# Altium PCB PCB1.PcbDoc
Units mil, origin at the board's own origin, x right, y up, seen from the top; angles counter-clockwise.
Board outline 3230 x 2225 mil, 2 copper layers (Top Layer, Bottom Layer); 34 components, 32 nets, 154 pads, 14 vias.
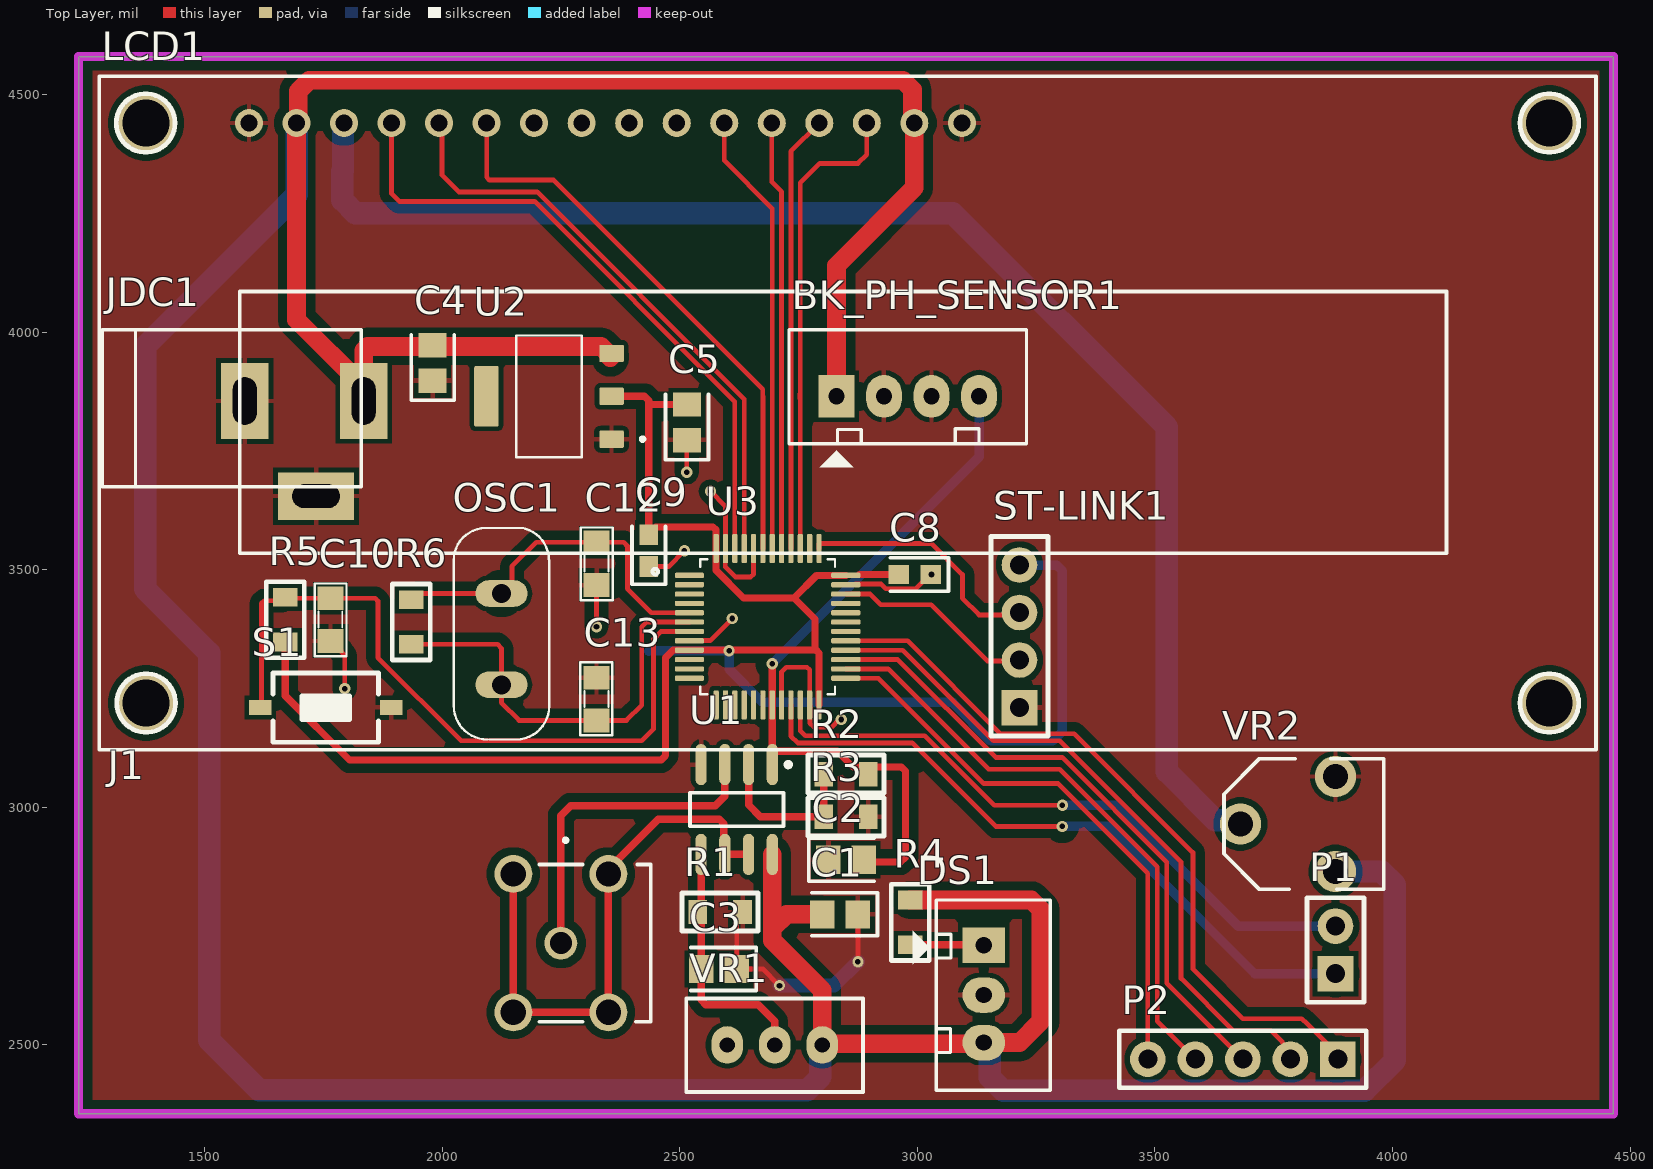
[diagram p0: Top Layer view]
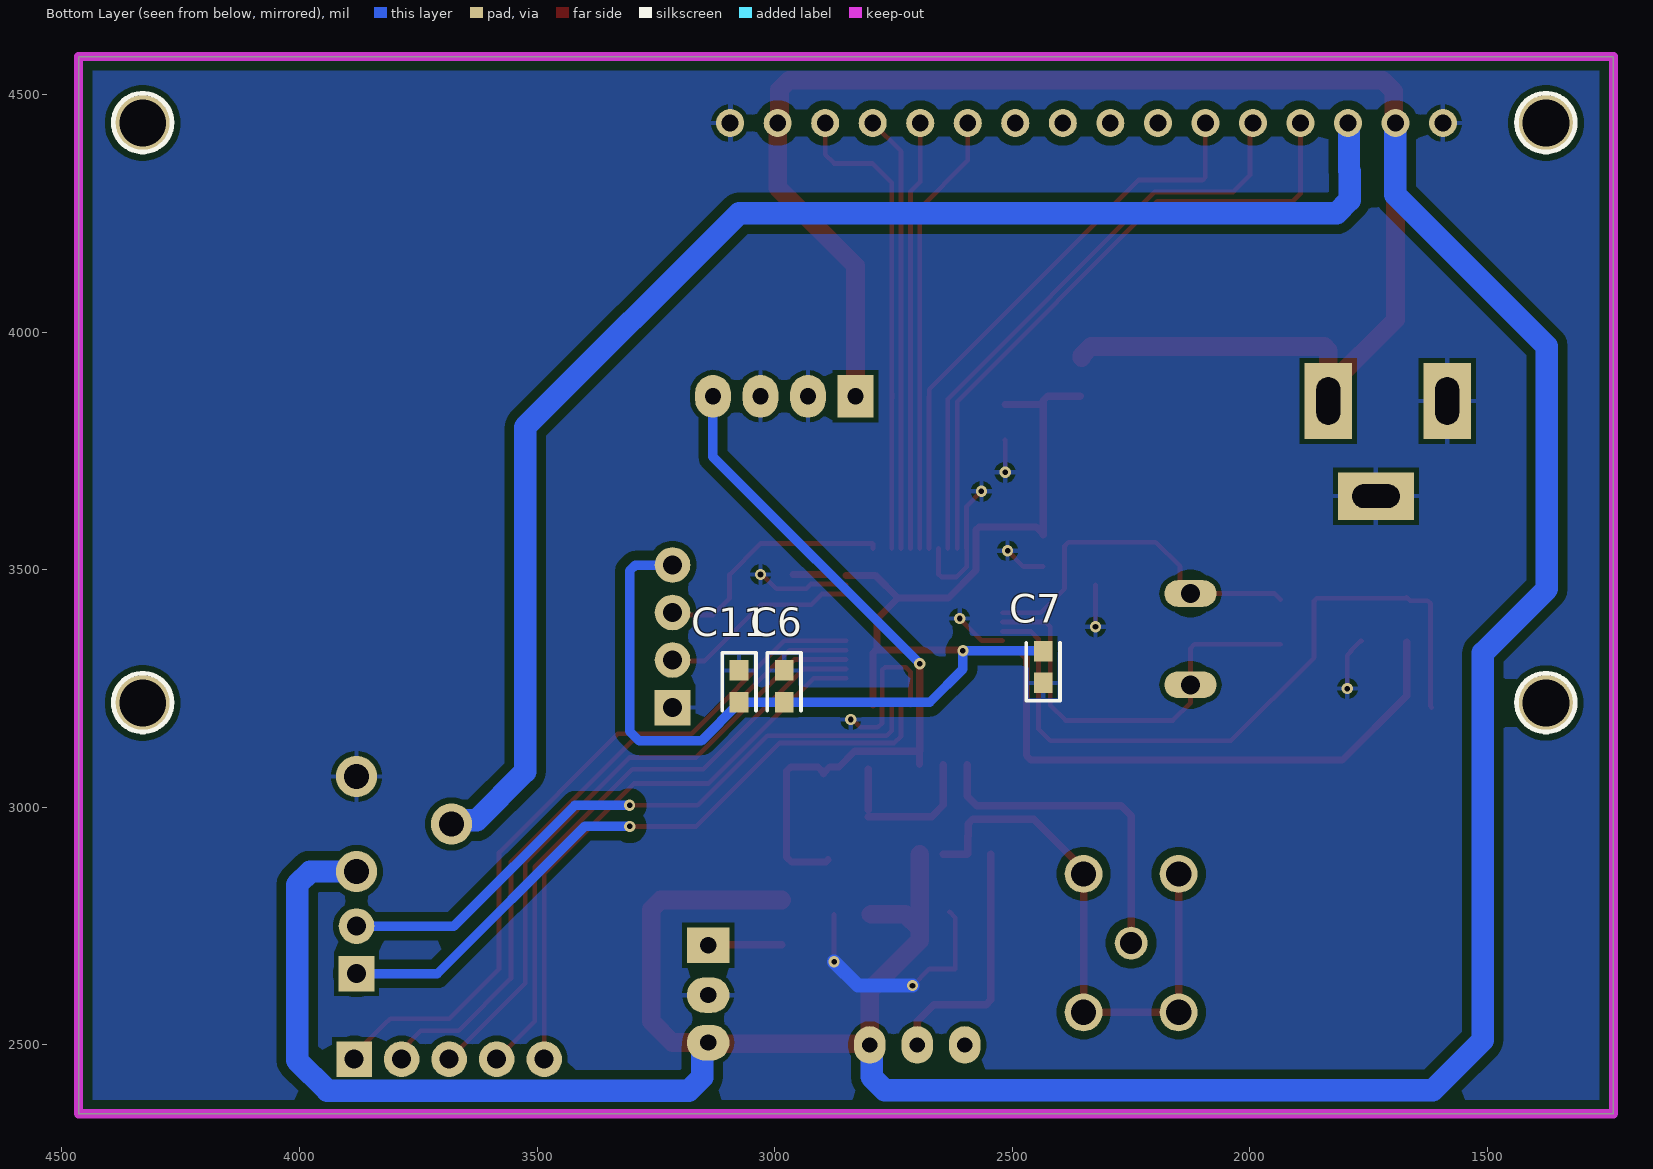
[diagram p1: Bottom Layer view, seen from below]
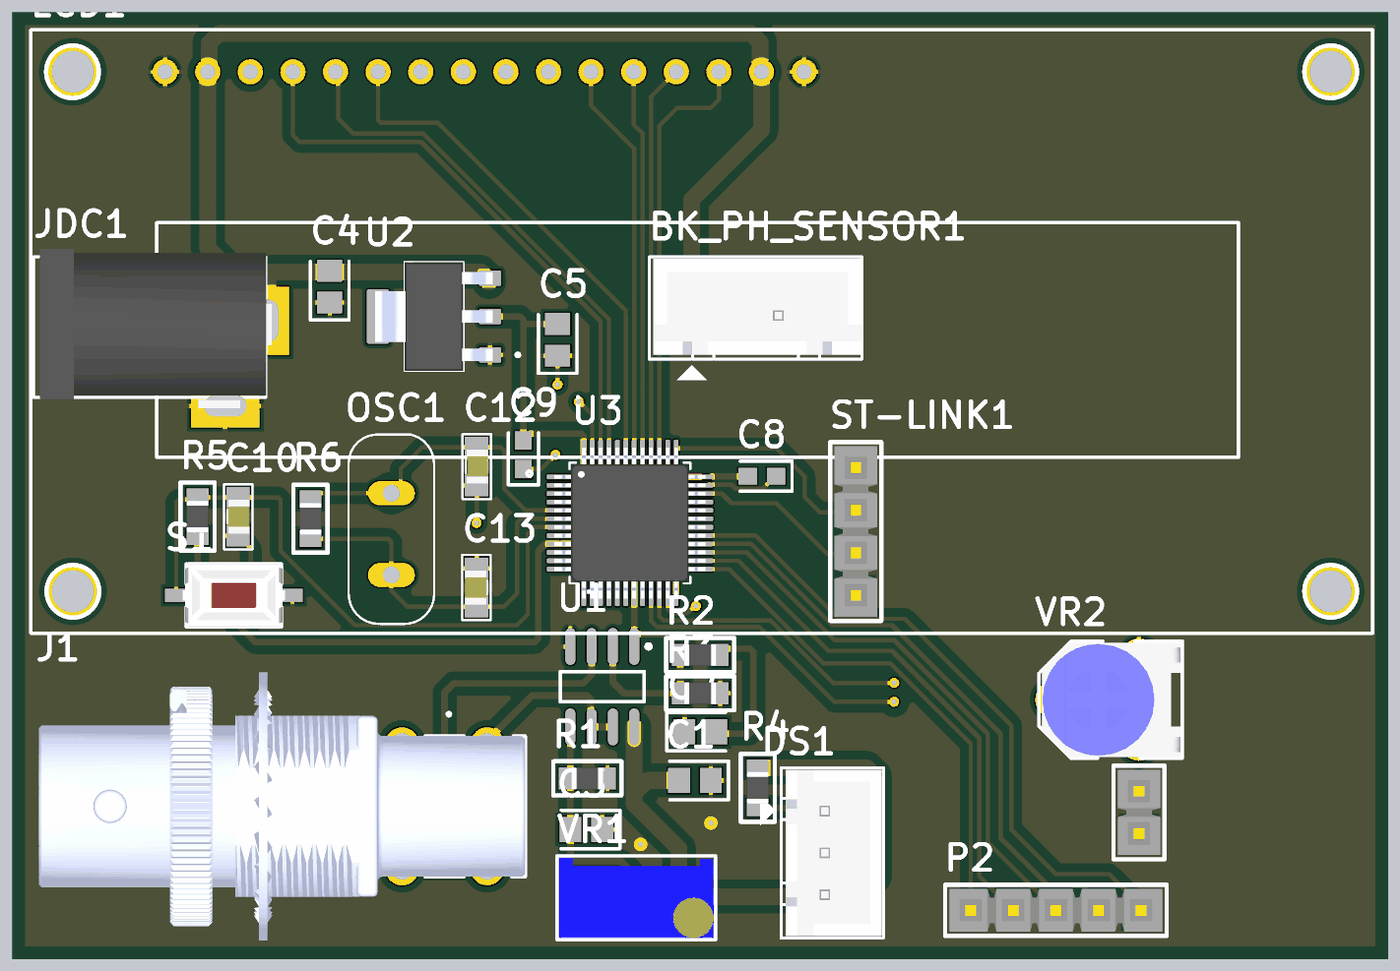
[diagram p2: 3D render of the assembled board from above, using the file's embedded part models]

## Layer stack, top to bottom
Top Solder: solder mask 0.4, Solder Resist, Dk 3.5
Top Layer: signal copper 1.4
Dielectric 1: dielectric 12.6, FR-4, Dk 4.8
Bottom Layer: signal copper 1.4
Bottom Solder: solder mask 0.4, Solder Resist, Dk 3.5

## Board outline
1235,2355 1235,4580 4465,4580 4465,2355

## Design rules (kind name [scope] priority, off if disabled: settings)
Clearance [All] p1: gap=10 ignorepadtopadclearanceinfootprint=TRUE except(5: Arc-Arc Arc-Track Arc-SMDPad Arc-THPad Arc-Via Track-Track Track-SMDPad Track-THPad Track-Via; 15: Arc-Hole Track-Hole; 20: Arc-Fill Arc-Poly Arc-Region Track-Fill Track-Poly Track-Region Via-Via Via-Fill Via-Poly Via-Region Fill-Fill Fill-Poly Fill-Region Poly-Poly Poly-Region Region-Region; 30: Fill-Hole Poly-Hole Region-Hole)
PolygonConnect [All] p1: connectstyle=Relief reliefconductorwidth=10 reliefentries=4 polygonreliefangle="90 Angle" airgapwidth=10
RoutingVias [All] p1: holewidth=11.81 width=23.62 viastyle="Through Hole" minholewidth=11.81 minwidth=23.62 maxholewidth=11.81 maxwidth=23.62
SolderMaskExpansion [All] p1: expansion=4 istentingtop=FALSE
Width [All] p1: maxlimit=47.24 minlimit=10 preferedwidth=30 toplayer_maxwidth=39.37 toplayer_prefwidth=10 bottomlayer_minwidth=20 minimp=50.000000 maximp=50.000000 favimp=50.000000
30 further rules are at their usual default settings.

## Classes and differential pairs
component class MCU: C6 C7 C8 C9 C10 C11 C12 C13 OSC1 P1 P2 R5 R6 S1 ST-LINK1 U3
component class Sheet3: BK_PH_SENSOR1 C1 C2 C3 C4 C5 DS1 J1 JDC1 LCD1 R1 R2 R3 R4 U1 U2 VR1 VR2

## Components (designator, comment, footprint, x,y, rotation, side; value= is the part's Value field where it differs from the comment)
BK_PH_SENSOR1 "JP4" CON4 2830,3865 r0 top value="Connector 4"
C1 "100nF" C2012-0805 2837.81,2774.72 r180 top
C2 "100nF" C2012-0805 2850,2890 r0 top
C3 "100nF" C2012-0805 2582.81,2659.72 r180 top
C4 "100nF" C2012-0805 1980,3935 r90 top
C5 "100nF" C2012-0805 2515,3810 r90 top
C6 "104" C1608-0603 2980.11,3255 r270 bottom
C7 "104" C1608-0603 2435,3295 r90 bottom
C8 "104" C1608-0603 2995,3490 r180 top
C9 "104" C1608-0603 2435,3540 r90 top
C10 "104" SM-0805 1765,3395 r90 top value=103
C11 "104" C1608-0603 3075.11,3255 r270 bottom
C12 "30pF" SM-0805 2325,3513 r90 top value=103
C13 "30pF" SM-0805 2325,3228 r270 top value=103
DS1 "JP3" CON3 3140,2705 r270 top value="Connector 3"
J1 "BNC5 - pH_Probe" SAMTEC_BNC5-J-P-GN-RA-BH2D 2250,2714.33 r270 top
JDC1 "Jac DC" DC-IN 1835,3855 r0 top
LCD1 "LCD16x2A" LCD16X2 1593.78,4440 r0 top
OSC1 "Crystal2" Crystal.HC49/USxx 2125,3450 r0 top value=8MHz
P1 "Header 2" "Header 2" 3880,2650 r90 top
P2 "Header 5" "Header 5" 3885,2470 r180 top
R1 "RESISTOR" R-0805 2585,2780 r180 top value=4.7K
R2 "RESISTOR" R-0805 2850,3070 r0 top value=10k
R3 "RESISTOR" R-0805 2850,2980 r180 top value=10k
R4 "RESISTOR" R-0805 2985,2758 r270 top value=4.7K
R5 "RESISTOR" R-0805 1670,3395 r270 top value=1K
R6 "RESISTOR" R-0805 1935,3390 r90 top value=1K
S1 "SW-SMD" SW-SMD 1755,3210 r180 top
ST-LINK1 "Header 4" "Header 4" 3215,3210 r90 top
U1 "TLE2142" SOIC8 2695,3090 r180 top
U2 "AMS1117-3.3" SOT229P700X180-4N 2225,3865 r180 top
U3 "STM32F103C8T6" QFP50P900X900X160-48N 2685,3380 r0 top
VR1 "Variable Resistor" VRes-R 2800,2500 r180 top value=10k
VR2 "" VRes-C 3880,2865 r90 top value=1K

## Footprints (in the part's own frame and the unit in brackets; to place one, negate y for a bottom-side part, rotate by r counter-clockwise, add the part's x,y. Pads: shape width x height; smd on the part's side, far side on the other; paste and mask are expansions set on the pad)
C1608-0603 [mm] "Capacitor Chip 0603 package"
  rect 1.1x1 smd: 1(-0.843,0.001) 2(0.857,0.001)
  silkscreen extent -1.79,-0.9 1.31,0.9, body extent -0.71,-0.43 0.71,0.43, height 0.81
C2012-0805 [mm] "Capacitor Chip 0805 package"
  rect 1.3x1.5 smd: 1(-0.945,-0.007) 2(0.955,-0.007)
  silkscreen extent -1.99,-1.16 1.51,1.14, body extent -0.89,-0.58 0.89,0.58, height 0.79
CON3 [mil] "CON 3"
  rect 75x90 hole 34: 1(-5,0)
  oval 75x90 hole 34: 2(100,0) 3(200,0)
  silkscreen extent -100,-150 300,140, body extent -95,-90 295,136, height 276
CON4 [mil] "CON4"
  rect 75x90 hole 34: 1(0,0)
  oval 75x90 hole 34: 2(100,0) 3(200,0) 4(300,0)
  silkscreen extent -100,-150 400,140, body extent -90,-90 398,136, height 276
Crystal.HC49/USxx [mil] "HC49USxx package"
  rrect100% 110x56 hole 40: 1(0,0) 2(0,-192)
  silkscreen extent -100,-307 100,138, body extent -90,-298 90,128, height 200
DC-IN [mil] "Jac DC input"
  rect 100x160 hole 50 slot 100 at 90 deg: 1(0,0) 2(-250,0)
  rect 160x100 hole 50 slot 100 at 0 deg: 3(-100,-200)
  silkscreen extent -550,-180 -5,150, body extent -535,-205 9,169, height 434
"Header 2" [mil] "Connector; Header; 2 Position; Solder Pad 35mil"
  rect 75x75 hole 40: 1(0,0)
  round 75 hole 40: 2(100,0)
  silkscreen extent -60,-60 160,60, body extent -50,-50 150,50, height 330
"Header 4" [mil] "Connector; Header; 4 Position; Solder Pad 35mil"
  rect 75x75 hole 40: 1(0,0)
  round 75 hole 40: 2(100,0) 3(200,0) 4(300,0)
  silkscreen extent -60,-60 360,60, body extent -50,-50 350,50, height 330
"Header 5" [mil] "Connector; Header; 5 Position; Solder Pad 35mil"
  rect 75x75 hole 40: 1(0,0)
  round 75 hole 40: 2(100,0) 3(200,0) 4(300,0) 5(400,0)
  silkscreen extent -60,-60 460,60, body extent -50,-50 450,50, height 83
LCD16X2 [mm] "Character LCD 16x2"
  round 1.5 hole 0.9: 1(0,0) 2(2.54,0) 3(5.08,0) 4(7.62,0) 5(10.16,0) 6(12.7,0) 7(15.24,0) 8(17.78,0) 9(20.32,0) 10(22.86,0) 11(25.4,0) 12(27.94,0) 13(30.48,0) 14(33.02,0) 15(35.56,0) 16(38.1,0)
  round 3 hole 2.5 unplated: M1(-5.5,0) M2(69.5,0) M3(-5.5,-31) M4(69.5,-31)
  silkscreen extent -8,-33.5 72,2.5, body extent -8.01,-33.5 72,2.5, height 14.16
QFP50P900X900X160-48N [mm]
  rrect50% 1.56x0.28 smd: 1(-4.18,2.75) 2(-4.18,2.25) 3(-4.18,1.75) 4(-4.18,1.25) 5(-4.18,0.75) 6(-4.18,0.25) 7(-4.18,-0.25) 8(-4.18,-0.75) 9(-4.18,-1.25) 10(-4.18,-1.75) 11(-4.18,-2.25) 12(-4.18,-2.75) 25(4.18,-2.75) 26(4.18,-2.25) 27(4.18,-1.75) 28(4.18,-1.25) 29(4.18,-0.75) 30(4.18,-0.25) 31(4.18,0.25) 32(4.18,0.75) 33(4.18,1.25) 34(4.18,1.75) 35(4.18,2.25) 36(4.18,2.75)
  rrect50% 0.28x1.56 smd: 13(-2.75,-4.18) 14(-2.25,-4.18) 15(-1.75,-4.18) 16(-1.25,-4.18) 17(-0.75,-4.18) 18(-0.25,-4.18) 19(0.25,-4.18) 20(0.75,-4.18) 21(1.25,-4.18) 22(1.75,-4.18) 23(2.25,-4.18) 24(2.75,-4.18) 37(2.75,4.18) 38(2.25,4.18) 39(1.75,4.18) 40(1.25,4.18) 41(0.75,4.18) 42(0.25,4.18) 43(-0.25,4.18) 44(-0.75,4.18) 45(-1.25,4.18) 46(-1.75,4.18) 47(-2.25,4.18) 48(-2.75,4.18)
  silkscreen extent -6.15,-3.6 3.6,3.6, body extent -4.5,-4.5 4.5,4.5, height 1.6
R-0805 [mm] "Chip Resistor; Body 2.0 x 1.3 mm (LxW typ) [2012]"
  rect 1x1.3 smd: 1(-1.194,0) 2(1.194,0)
  silkscreen extent -2.03,-1.02 2.03,1.02, body extent -0.95,-0.65 0.95,0.65, height 0.63
SAMTEC_BNC5-J-P-GN-RA-BH2D [mm]
  round 1.755 hole 1.17: 1(0,0)
  round 2.025 hole 1.35: S_1(-3.7,-2.54) S_2(3.7,-2.54) S_3(3.7,2.54) S_4(-3.7,2.54)
  silkscreen extent -5.6,-1.15 4.2,4.81, body extent -8,-24.19 8,4.81, height 12
SM-0805 [mil] "Compoment SMD 80x50mil"
  rect 50x55 smd: 1(-45,0) 2(45,0)
  silkscreen extent -77,-34 76,33, body extent -40,-27 40,23, height 24
SOIC8 [mm] "SOIC, 8-Leads, Body 4.9x3.9mm, Pitch 1.27mm, IPC Medium Density"
  oval 0.6x2.2 smd: 1(0,0) 2(1.27,0) 3(2.54,0) 4(3.81,0) 5(3.81,4.8) 6(2.54,4.8) 7(1.27,4.8) 8(0,4.8)
  silkscreen extent -0.98,-0.12 4.41,3.3, body extent -0.55,0.45 4.36,4.35, height 1.75
SOT229P700X180-4N [mm]
  rrect15% 1.31x0.93 smd: 1(-3.345,2.29) 2(-3.345,0) 3(-3.345,-2.29)
  rrect15% 1.31x3.24 smd: 4(3.345,0)
  silkscreen extent -5.1,-3.25 1.75,3.25, body extent -3.5,-3.25 3.5,3.25, height 1.8
SW-SMD [mm] "Switch SMD type"
  rect 1.2x0.8 smd: 1(-3.5,0) 2(3.5,0)
  silkscreen extent -2.82,-1.85 2.82,1.85, body extent -3.05,-1.85 3.05,1.85, height 2.5
VRes-C [mil] "Potentiometer; 3 Leads; Circle; Solder pad 35mil"
  round 87 hole 52: 1(0,0) 2(100,200) 3(200,0)
  silkscreen extent -38,-102 238,235, body extent -35,-97 234,228, height 300
VRes-R [mil] "Potentiometer; 3 Leads; Rectangle; Solder pad 35mil"
  oval 67x79 hole 32: 1(0,0) 2(100,0) 3(200,0)
  silkscreen extent -86,-98 286,99, body extent -81,-94 281,95, height 474

## Part data
BK_PH_SENSOR1: library part Con4, "Connector 4"
C1 C2 C3 C4 C5 C6 C7 C8 C9 C11: library part Capacitor, "Capacitor", Volt=16V, AEMS Code=2100341, ComponentLink1Description="Digikey Part Link", ComponentLink2Description="Open Datasheet", ComponentLink2URL=H:\LIBRARY\LIBRARY.Datasheet\, Published=13-April-2009, Publisher="Hoang Nguyen", Vendor=Digikey
C10 C12 C13: library part CM, "Cap SMD"
DS1: library part Con3, "Connector 3"
J1: library part BNC5-J-P-GN-RA-BH2D, "BNC Connector Jack, Female Socket 50Ohm Panel Mount, Through Hole, Right Angle Solder", Package=None, Availability="In Stock", Check_prices=https://www.snapeda.com/parts/BNC5-J-P-GN-RA-BH2D/Samtec%20Inc./view-part/933377/?ref=eda, MF=Samtec, MP=BNC5-J-P-GN-RA-BH2D, Price=None, Purchase-URL=https://pricing.snapeda.com/search/part/BNC5-J-P-GN-RA-BH2D/?ref=eda, SnapEDA_Link=https://www.snapeda.com/parts/BNC5-J-P-GN-RA-BH2D/Samtec%20Inc./view-part/933377/?ref=snap
JDC1: library part DCIN, "Jac DC input"
LCD1: library part LCD16x2, "LCD dipslay 16 char, 2 line"
OSC1: "Quarz Crystal", ComponentLink1Description="Digikey Part Link", ComponentLink2Description="Open Datasheet", ComponentLink2URL=H:\LIBRARY\LIBRARY.Datasheet\, Price="2000 VND", Published=13-April-2009, Publisher="Hoang Nguyen", Vendor=Digikey
P1: "Header, 2-Pin", LatestRevisionDate=17-Jul-2002, LatestRevisionNote="Re-released for DXP Platform.", Publisher="Altium Limited"
P2: "Header, 5-Pin", LatestRevisionDate=17-Jul-2002, LatestRevisionNote="Re-released for DXP Platform.", Publisher="Altium Limited"
R1 R2 R3 R4 R5 R6: "Resistor", LatestRevisionDate=17-Jul-2002, LatestRevisionNote="Re-released for DXP Platform.", PackageReference=AXIAL-0.3, Published=8-Jun-2000, Publisher="Altium Limited"
S1: "Switch", LatestRevisionDate=17-Jul-2002, LatestRevisionNote="Re-released for DXP Platform.", PackageReference=SPST-2, Published=24-Mar-1999, Publisher="Altium Limited"
ST-LINK1: "Header, 4-Pin", LatestRevisionDate=17-Jul-2002, LatestRevisionNote="Re-released for DXP Platform.", Publisher="Altium Limited"
U1: library part LM2904, "Low-Power Dual Operational Amplifier", ComponentLink1Description="Manufacturer Link", ComponentLink1URL=http://www.national.com/, ComponentLink2Description=Datasheet, ComponentLink2URL=http://www.national.com/ds.cgi/LM/LM158.pdf, ComponentLink3Description="URL Link1", ComponentLink3URL=http://www.national.com/pf/LM/LM358.html, DatasheetVersion=Sep-1999, LatestRevisionDate=06-Jun-2005, LatestRevisionNote="Stylized 3D Model Added.", PackageDescription="DIP; 8 Leads; Row Spacing 7.62 mm; Pitch 2.54 mm", PackageReference=N08E, PackageVersion=Sep-1997, Published=15-Apr-2002, Publisher="Altium Limited"
U2: "Sot223/Pkg 1-Amp 3.3-Volt Low Drop Out Voltage Regulatator", Package="SOT-223 Seeed Technology", Availability="Not in stock", Check_prices=https://www.snapeda.com/parts/AMS1117-3.3/Advanced+Monolithic+Systems/view-part/?ref=eda, MF="Advanced Monolithic Systems", MP=AMS1117-3.3, Price=None, SnapEDA_Link=https://www.snapeda.com/parts/AMS1117-3.3/Advanced+Monolithic+Systems/view-part/?ref=snap
U3: "ARMÂ® CortexÂ®-M3 STM32F1 Microcontroller IC 32-Bit 72MHz 64KB (64K x 8) FLASH 48-LQFP (7x7)", Package="LQFP-48 STMicroelectronics", Availability="In Stock", Check_prices=https://www.snapeda.com/parts/STM32F103C8T6/STMicroelectronics/view-part/?ref=eda, MF=STMicroelectronics, MP=STM32F103C8T6, Price=None, Purchase-URL=https://pricing.snapeda.com/search/part/STM32F103C8T6/?ref=eda, SnapEDA_Link=https://www.snapeda.com/parts/STM32F103C8T6/STMicroelectronics/view-part/?ref=snap
VR2: library part "Variable Resistor", "Variable Resistor", LatestRevisionDate=17-Jul-2002, LatestRevisionNote="Re-released for DXP Platform.", PackageReference=AXIAL-0.3, Published=8-Jun-2000, Publisher="Altium Limited"
VR1: LatestRevisionDate=17-Jul-2002, LatestRevisionNote="Re-released for DXP Platform.", PackageReference=AXIAL-0.3, Published=8-Jun-2000, Publisher="Altium Limited"

## Via types
v1: diameter 23.62, hole 11.81, Top Layer to Bottom Layer, 14 vias

## Nets (pads, with @x,y where several pads share a name; then routed paths per layer and width w, separated by ;. In a path a pad name is that pad's centre, name@x,y a point inside that pad or via, vN(x,y) a via of type N, cw(c..) or ccw(c..) an arc to the next point about the centre after c; other vN are vias at no path point)
3V3: C5.2 C6.2 C7.2 C8.2 C9.2 C11.2 R5.2 ST-LINK1.4 U2.2 U3.9 U3.24 U3.36 U3.48 | length 4242.2
  Top Layer w15: R5.2 1670,3235 1805,3100 2461.21,3100 2470,3108.79 2470,3314.96 2485.83,3330.79 U3.9 v1@2603.97,3330.79 ; U2.2 2426.16,3865 2434.95,3856.21 2434.95,3847.61 ; C9.2 C9.2@2434.95,3575.31 ; C5.2 2434.95,3847.61 ; v1@2605,3330.79 2785,3330.79 ; U3.24 2793.27,3324.93 2787.41,3330.79 2785,3330.79 ; U3.36 2788.27,3488.27 2740.69,3440.69 ; U3.36@2878.4,3489.95 C8.2 ; C9.2@2434.95,3575.31 2434.95,3847.61 ; C9.2@2434.95,3575.31 2449.63,3590 2570.36,3590 2576.22,3584.14 2576.22,3545.08 U3.48 2576.22,3544.06 2576.22,3498.78 2634.31,3440.69 2740.69,3440.69 ; 2740.69,3440.69 2785,3396.38 2785,3330.79
  Bottom Layer w20: C7.2 2436.08,3329.76 v1(2603.97,3329.76) 2603.97,3291.03 2673.73,3221.27 C6.2 C11.2 3075.05,3219.3 3154.35,3140 3285,3140 3305,3160 3305,3498.28 3293.28,3510 ST-LINK1.4
+5: BK_PH_SENSOR1.1 C1.2 C4.2 DS1.3 JDC1.1 LCD1.2 LCD1.15 R4.1 U1.8 U2.3 VR1.1 VR2.1 | length 9913.6
  Top Layer w39.37: JDC1.1 JDC1.1@1835,3885 ; U2.3@2354.13,3946.02 2354.13,3950.24 2334.37,3970 1843.79,3970 1835,3961.21 JDC1.1@1835,3885 ; U1.8 2695,2745 ; C1.2@2797.39,2775.28 2725.28,2775.28 2695,2745 ; BK_PH_SENSOR1.1 2830,4140 2993.78,4303.78 LCD1.15 2990.01,4443.77 2990.01,4509.99 2970,4530 1720.61,4530 1697.55,4506.94 1697.55,4443.77 LCD1.2 1693.78,4026.22 JDC1.1@1835,3885 ; R4.1 3240,2805 3260,2785 3260,2550 3215,2505 DS1.3 3137.5,2502.5 2802.5,2502.5 VR1.1 2800,2615 2695,2720 2695,2745
  Bottom Layer w47.24: LCD1.2 1693.78,4288.78 1375,3970 1375,3460 1510,3325 1510,2510 1615,2405 2768.55,2405 2796.22,2432.68 2796.22,2496.22 VR1.1 ; DS1.3 3152.81,2492.19 3152.81,2431.55 3180.49,2403.88 3941.2,2403.88 4005,2467.68 4005,2837.32 3977.32,2865 3895,2865 3890,2860 3885,2865 VR2.1
A8: P2.1 U3.29 | length 1549.5
  Top Layer w10: U3.29 2979.53,3350.47 3175,3155 3330,3155 3580,2905 3580,2660 3685,2555 3809.14,2555 3814.14,2550 3815,2550 3885,2480 P2.1
A9: U3.30
A10: U3.31
A11: U3.32
B2: P2.5 U3.25 | length 1196.8
  Top Layer w10: U3.25 2918.27,3271.73 3140,3050 3296.36,3050 3485,2861.36 P2.5
B3: P2.4 U3.26 | length 1266.1
  Top Layer w10: U3.26 2938.58,3291.42 3150,3080 3300,3080 3505,2875 3505,2550 P2.4
B4: P2.3 U3.27 | length 1333.2
  Top Layer w10: U3.27 2958.9,3311.1 3165,3105 3305,3105 3525,2885 3525,2630 P2.3
B5: P2.2 U3.28 | length 1447.2
  Top Layer w10: U3.28 2969.21,3330.79 3160,3140 3300,3140 3555,2885 3555,2640 3665,2530 3745,2530 3767.88,2507.12 3767.88,2504.71 3785,2487.59 P2.2
D4: LCD1.11 U3.42 | length 937.3
  Top Layer w10: LCD1.11 2593.78,4361.22 2694.84,4260.16 U3.42
D5: LCD1.12 U3.41 | length 904
  Top Layer w10: LCD1.12 2693.78,4316.22 2714.53,4295.47 U3.41
D6: LCD1.13 U3.40 | length 920.1
  Top Layer w10: U3.40 2734.21,4380.43 LCD1.13
D7: LCD1.14 U3.39 | length 1000.3
  Top Layer w10: U3.39 2753.9,3855.38 cw(c2805,3865) 2753.9,3874.62 2753.9,4313.9 2795,4355 2875,4355 2893.78,4373.78 LCD1.14
Data: DS1.1 R4.2 | length 155.4
  Top Layer w15: R4.2 3139,2711 DS1.1
EN: LCD1.6 U3.43 | length 1215.5
  Top Layer w10: LCD1.6 2093.78,4325.86 2099.64,4320 2235,4320 2675,3880 2675,3865 2675.16,3864.84 U3.43
GND: BK_PH_SENSOR1.2 BK_PH_SENSOR1.3 C1.1 C2.1 C3.1 C4.1 C5.1 C6.1 C7.1 C8.1 C9.1 C10.1 C11.1 C12.1 C13.1 DS1.2 JDC1.2 JDC1.3 LCD1.1 LCD1.16 R1.1 R3.1 S1.1 ST-LINK1.1 U1.4 U2.1 U3.8 U3.20 U3.23 U3.35 U3.44 U3.47 VR2.3 | length 1799.8
  Top Layer w10: C10.1 1767.5,3350 1787.5,3330 1787.5,3327.5 1795,3320 v1(1795,3250) ; v1(2325,3380) C12.1 ; C9.1 2476.8,3506.8 v1(2510,3540) ; v1(2515,3705) 2515,3772.54 C5.1 ; U3.8 2520.94,3350.98 2564.51,3350.98 v1(2610.84,3397.32) ; v1(2565,3665) 2596.42,3633.58 U3.47 2595.91,3544.06 2595.91,3506.02 2616.92,3485 2649.61,3485 2655.47,3490.86 U3.44 ; R1.1 2620,2768 C3.1 2675,2660 v1(2710,2625) ; U3.20 2714.53,3285.35 2724.18,3295 2767.72,3295 2773.58,3289.14 U3.23 2774.09,3214.92 2774.09,3177.51 2783.09,3168.52 2791.37,3168.52 2819.83,3168.52 2836.31,3185 v1(2840,3185) ; U3.35 2869.49,3468.58 2870,3469.09 2870,3470 2923.66,3470 2933.4,3460.26 2996.54,3460.26 C8.1@3026.17,3489.89 ; v1(2875,2675) C1.1 ; C8.1 3028.25,3490 v1(3030,3490)
  Bottom Layer w30: v1(2710,2625) 2825,2625 v1(2875,2675)
NetC3_2: C3.2 R1.2 U1.5 VR1.2 | length 529.7
  Top Layer w15.75: U1.5 2545,2660.2 C3.2 2545.2,2594.8 2555,2585 2665,2585 2700,2550 VR1.2
NetLCD1_3: LCD1.3 VR2.2 | length 3022.3
  Bottom Layer w47.24: LCD1.3 1791.52,4437.74 1791.52,4340.06 1790,4338.54 1790,4277.68 1817.67,4250 3075,4250 3525,3800 3525,3075 3627.39,2972.61 3672.39,2972.61 VR2.2
NetR2_1: R2.1 R3.2 U1.2 | length 338.4
  Top Layer w15.75: U1.2 2645,3005 2670,2980 R3.2 ; R3.2@2803,2995 R2.1@2803,3080
NRST: C10.2 R5.1 S1.2 U3.7 | length 1527.2
  Top Layer w10: S1.2 1620,3212.8 1620,3429.14 1625.86,3435 1663,3435 R5.1 1672,3440 C10.2 1859.14,3440 1865,3434.14 1865,3315 2040,3140 2420,3140 2445,3165 2445,3354.3 2460.86,3370.16 U3.7
OSC_IN: C12.2 OSC1.1 R6.2 U3.5 | length 770.7
  Top Layer w10: R6.2 1948,3450 OSC1.1 2125.75,3450 2147,3471.25 2147,3507 2198,3558 C12.2 2382,3558 2390,3550 2390,3460 2440.47,3409.53 U3.5
OSC_OUT: C13.2 OSC1.2 R6.1 U3.6 | length 901.4
  Top Layer w10: R6.1 2117,3343 2125,3335 OSC1.2 2125,3220 2162,3183 C13.2 2388,3183 2420,3215 2420,3380 2429.84,3389.84 U3.6
p_AOUT: BK_PH_SENSOR1.4 C2.2 R2.2 U1.1 U3.19 | length 1538.4
  Top Layer w15: U1.1@2694.92,3118.09 U3.19@2694.92,3215.43 ; v1(2694.92,3302.38) 2694.88,3302.34 U3.19@2694.88,3215.47 ; U1.1 2695,3115 2698.09,3118.09 2831.91,3118.09 2864.95,3085.05 2884.81,3085.05 2897,3072.86 R2.2 ; C2.2 2892.34,2885 2965,2885 2975,2895 2975,3076.21 2966.21,3085 2909.19,3085 R2.2@2897,3072.81 ; U3.19@2694.88,3215.47 U3.19@2694.92,3215.43
  Bottom Layer w20: v1(2694.92,3302.38) 3130,3737.46 BK_PH_SENSOR1.4
PH+: J1.1 U1.3 | length 696.7
  Top Layer w15.75: J1.1 2250,2982.29 2270.86,3003.15 2575,3003.15 2595,3023.15 U1.3
PH-: J1.S_1 J1.S_2 J1.S_3 J1.S_4 U1.6 U1.7 | length 1198.6
  Top Layer w15.75: J1.S_1 J1.S_2 J1.S_3 2350,2870 2455,2975 2583.81,2975 2593.04,2965.78 2593.04,2940.05 2593.49,2939.59 2593.49,2902.53 U1.6 U1.7
RS: LCD1.4 U3.46 | length 1361.6
  Top Layer w10: LCD1.4 1893.78,4291.22 1910,4275 2195,4275 2616.1,3853.9 U3.46
RW: LCD1.5 U3.45 | length 1262.5
  Top Layer w10: LCD1.5 1993.78,4428.78 1990,4425 1992.34,4425 2000,4417.34 2000,4330 2035,4295 2200,4295 2635.79,3859.21 U3.45
RX3: P1.2 U3.22 | length 1350.9
  Top Layer w10: U3.22 2753.9,3160.86 2764.16,3150.59 3015.59,3150.59 3161.79,3004.39 v1(3305.33,3004.39)
  Bottom Layer w20: v1(3305.33,3004.39) 3420.61,3004.39 3675,2750 P1.2
SWCLK: ST-LINK1.3 U3.37 | length 508.3
  Top Layer w10: U3.37 2793.27,3554.49 2793.78,3555 3030,3555 3095,3490 3095,3440 3130,3405 ST-LINK1.3@3200,3405
SWDIO: ST-LINK1.2 U3.34 | length 410
  Top Layer w10: U3.34 2901.1,3448.9 2923.64,3426.36 3029.17,3426.36 3147.5,3308.04 3196.96,3308.04 ST-LINK1.2@3200,3305
TX3: P1.1 U3.21 | length 1418.2
  Top Layer w10: U3.21 2734.21,3150.14 2748.76,3135.59 2989.41,3135.59 3165,2960 v1(3305,2960)
  Bottom Layer w20: v1(3305,2960) 3400,2960 3710,2650 P1.1
pads on no net: LCD1.7 LCD1.8 LCD1.9 LCD1.10 LCD1.M1 LCD1.M2 LCD1.M3 LCD1.M4 U2.4 U3.1 U3.2 U3.3 U3.4 U3.10 U3.11 U3.12 U3.13 U3.14 U3.15 U3.16 U3.17 U3.18 U3.33 U3.38 VR1.3

## Polygon pours and split planes (outlines as drawn)
GND on Bottom Layer "GND_L02_P000" (solid, pour order 0): 1240,4580 4460,4580 4460,2355 1240,2355 1235,2360
GND on Top Layer "GND_L01_P001" (solid, remove dead copper, pour order 1): 1240,4570 1245,4575 4460,4575 4460,2360 4455,2355 1235,2355

## Keep-outs
Keep-Out Layer:
  the board outline again, w19.68

## Text inside footprints (layer, text, board x,y; h text height)
J1: Mechanical 13 "PCB EDGE" at 2102.25,2462.41 h19.7 r270